# EAGLE board day0_YogaSanyoto_13215073 (EAGLE 7.6.0)
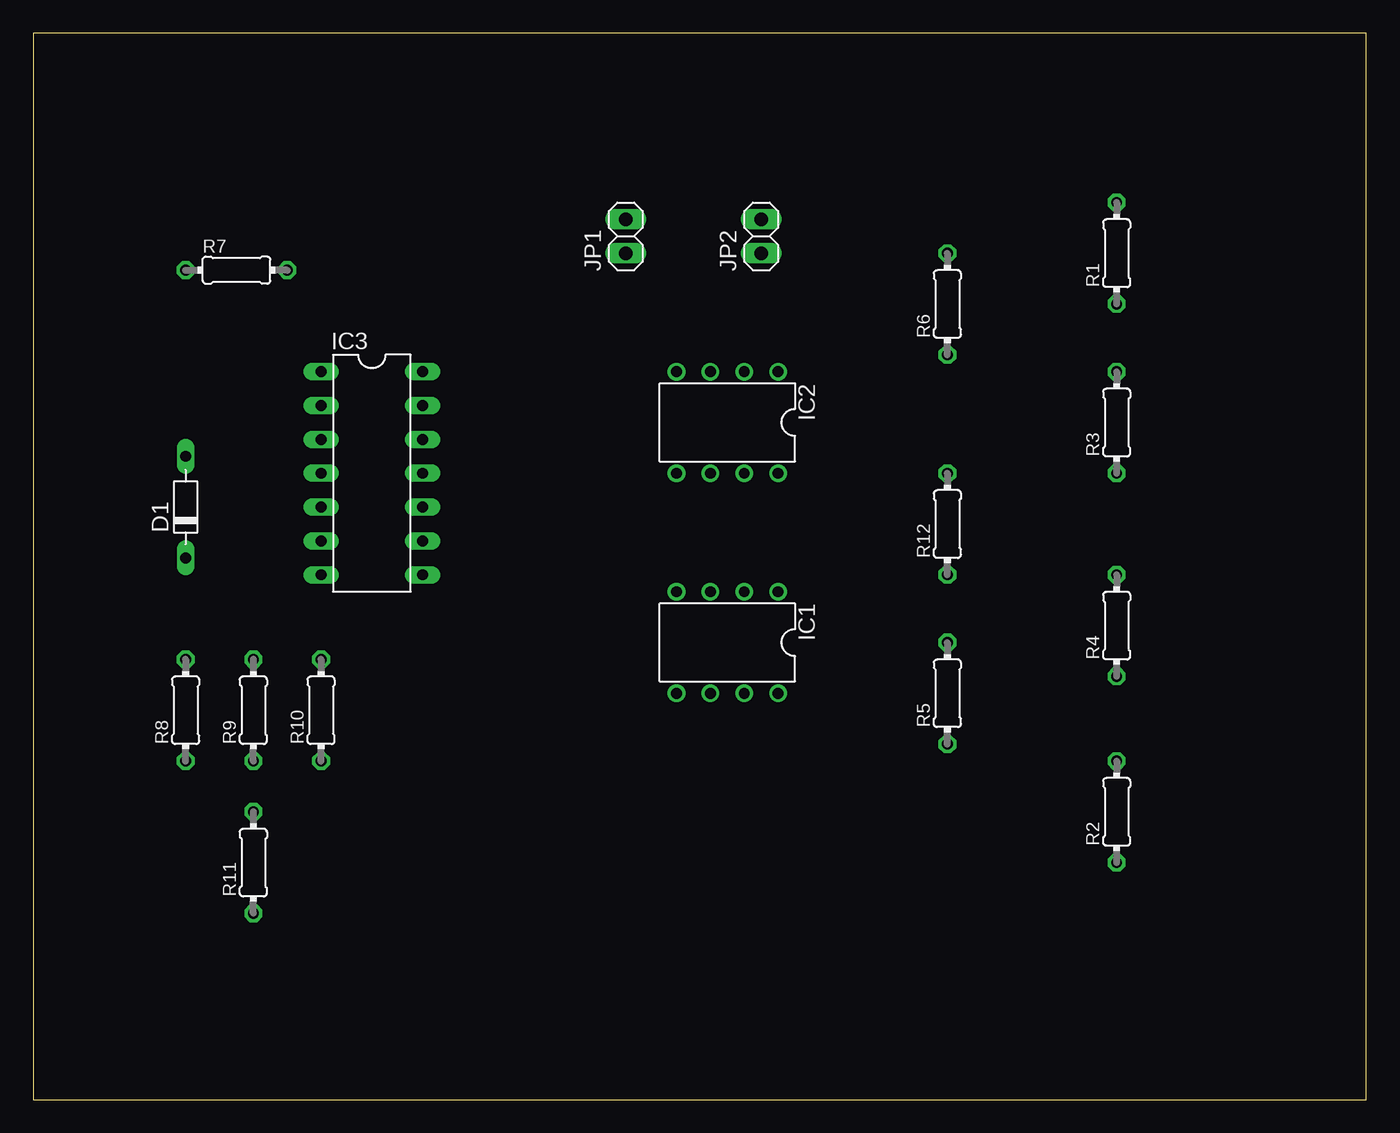
[diagram p0: board, top side]
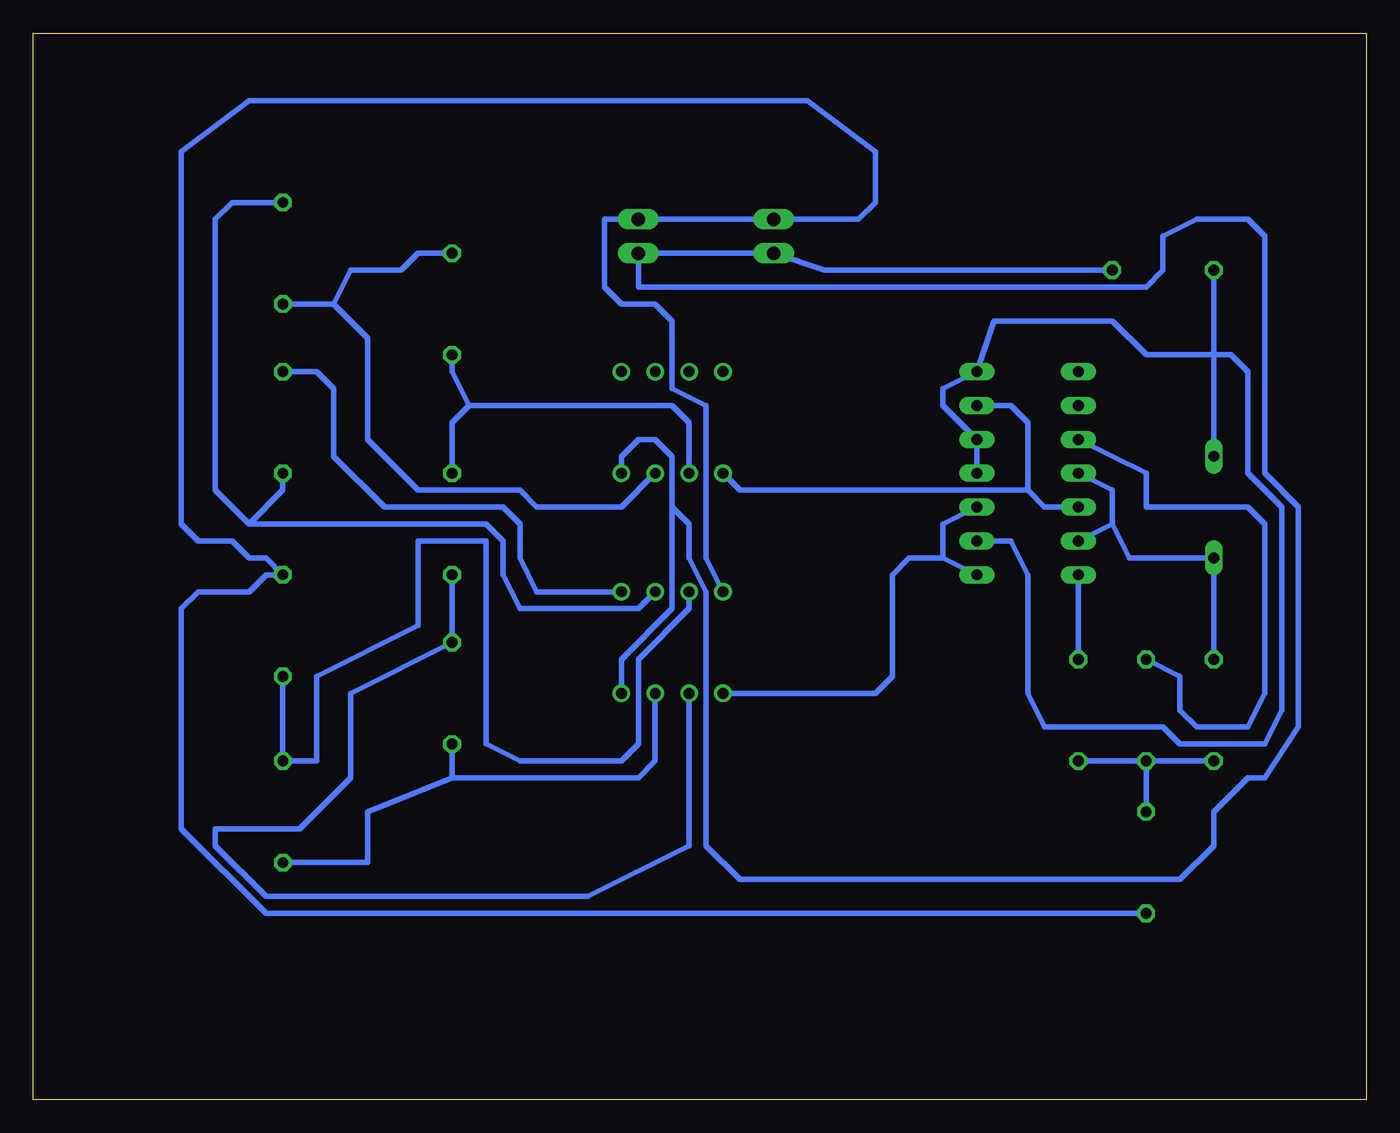
[diagram p1: board, bottom side, seen from below]

Size 100 x 80 mm. Coordinates in mm from the lower left corner, seen from the top.
Outline: 0,0 100,0 100,80 0,80 0,0
Copper layers (1*16): Top 0.035mm / dielectric 1.5mm / Bottom 0.035mm
Design rules "default": minimum track width 10mil, minimum drill 24mil, track to track 8mil, track to pad 8mil, pad to pad 8mil, via to via 8mil, smd to smd 8mil, copper to edge 40mil, drill to drill 8mil, minimum pad ring 10mil, minimum via ring 8mil, stop-mask expansion 4mil, vias tented up to drill 0mil, thermal gap 10mil

## Footprints (pad centres in the part's own frame; a part is rotated, then mirrored left to right if it is on the bottom)
D-7.5 = drill 0.813 long: A 3.81,0; C -3.81,0
DIL08 = drill 0.813 pad 1.27: 1 -3.81,-3.81; 2 -1.27,-3.81; 3 1.27,-3.81; 4 3.81,-3.81; 5 3.81,3.81; 6 1.27,3.81; 7 -1.27,3.81; 8 -3.81,3.81
DIL14 = drill 0.813 long: 1 -7.62,-3.81; 2 -5.08,-3.81; 3 -2.54,-3.81; 4 0,-3.81; 5 2.54,-3.81; 6 5.08,-3.81; 7 7.62,-3.81; 8 7.62,3.81; 9 5.08,3.81; 10 2.54,3.81; 11 0,3.81; 12 -2.54,3.81; 13 -5.08,3.81; 14 -7.62,3.81
1X02 = drill 1.016 long: 1 -1.27,0; 2 1.27,0
0204/7 = drill 0.813 octagon: 1 -3.81,0; 2 3.81,0

## Placement (x,y rotation side)
D1  [D-7.5]  11.43,44.45 90 top
IC1  LM358N  [DIL08]  52.07,34.29 180 top
IC2  LM358N  [DIL08]  52.07,50.8 180 top
IC3  [DIL14]  25.4,46.99 270 top
JP1  [1X02]  44.45,64.77 90 top
JP2  [1X02]  54.61,64.77 90 top
R1  100k  [0204/7]  81.28,63.5 90 top
R2  100k  [0204/7]  81.28,21.59 90 top
R3  100k  [0204/7]  81.28,50.8 90 top
R4  100k  [0204/7]  81.28,35.56 90 top
R5  100k  [0204/7]  68.58,30.48 90 top
R6  100k  [0204/7]  68.58,59.69 90 top
R7  60k  [0204/7]  15.24,62.23 0 top
R8  12K  [0204/7]  11.43,29.21 90 top
R9  100k  [0204/7]  16.51,29.21 90 top
R10  200k  [0204/7]  21.59,29.21 90 top
R11  60k  [0204/7]  16.51,17.78 90 top
R12  [0204/7]  68.58,43.18 90 top

## Library data of the parts
D1 = diode
IC1 IC2 = linear
IC3 = ic-package
JP1 JP2 = pinhead
R1-R12 = rcl

## Nets
GND: IC1.4 JP1.2 JP2.2 R4.2 R11.1
N$1: R8.1 R9.1 R10.1 R11.2
N$2: IC3.7 R10.2
N$3: IC3.3 R9.2
N$4: D1.C IC3.4 IC3.6 R8.2
N$5: D1.A IC3.9 IC3.11 IC3.12 IC3.14 R7.1
N$6: IC1.6 R5.2 R12.1
N$7: IC2.6 R6.1 R12.2
N$8: IC2.7 R1.1 R6.2
N$9: IC1.7 R2.1 R5.1
N$10: IC1.2 R1.2 R3.1
N$11: IC1.3 R2.2 R4.1
N$15: IC1.5 IC3.8 IC3.10
N$16: IC2.5 IC3.5 IC3.13
V-: IC2.4
VCC: IC1.8 IC2.8 JP1.1 JP2.1 R7.2
VOUT: IC1.1 R3.2

## Tracks (layer width: path | path; a pad name or v marks a point on that pad's centre or on a via)
GND
  Bottom 0.406: R11.1 82.55,13.97 88.9,20.32 88.9,36.83 87.63,38.1 83.82,38.1 82.55,39.37 R4.2 82.55,40.64 83.82,40.64 85.09,41.91 87.63,41.91 88.9,43.18 88.9,71.12 83.82,74.93 41.91,74.93 36.83,71.12 36.83,67.31 38.1,66.04 JP1.2 JP2.2 57.15,66.04 57.15,60.96 55.88,59.69 53.34,59.69 52.07,58.42 52.07,53.34 49.53,52.07 49.53,40.64 IC1.4
N$1
  Bottom 0.406: R11.2 R9.1 | R9.1 R10.1 | R8.1 R9.1
N$2
  Bottom 0.406: IC3.7 R10.2
N$3
  Bottom 0.406: R9.2 13.97,31.75 13.97,29.21 12.7,27.94 8.89,27.94 7.62,30.48 7.62,43.18 8.89,44.45 16.51,44.45 16.51,46.99 IC3.3
N$4
  Bottom 0.406: R8.2 D1.C 17.78,40.64 19.05,43.18 | IC3.6 19.05,43.18 | 19.05,43.18 19.05,45.72 IC3.4
N$5
  Bottom 0.406: D1.A 11.43,55.88 | 11.43,55.88 R7.1 | IC3.11 IC3.12 31.75,52.07 31.75,53.34 IC3.14 27.94,58.42 19.05,58.42 16.51,55.88 11.43,55.88 | IC3.9 26.67,41.91 25.4,39.37 25.4,30.48 24.13,27.94 15.24,27.94 13.97,26.67 7.62,26.67 6.35,29.21 6.35,44.45 8.89,46.99 8.89,54.61 10.16,55.88 11.43,55.88
N$6
  Bottom 0.406: IC1.6 50.8,19.05 58.42,15.24 82.55,15.24 86.36,19.05 86.36,20.32 80.01,20.32 76.2,24.13 76.2,30.48 R5.2 R12.1
N$7
  Bottom 0.406: IC2.6 50.8,50.8 52.07,52.07 67.31,52.07 | 67.31,52.07 68.58,54.61 R6.1 | R12.2 68.58,50.8 67.31,52.07
N$8
  Bottom 0.406: IC2.7 55.88,44.45 62.23,44.45 63.5,45.72 71.12,45.72 74.93,49.53 74.93,57.15 77.47,59.69 | 77.47,59.69 R1.1 | R6.2 71.12,63.5 72.39,62.23 76.2,62.23 77.47,59.69
N$9
  Bottom 0.406: R5.1 68.58,24.13 | 68.58,24.13 74.93,21.59 74.93,17.78 R2.1 | 68.58,24.13 60.96,24.13 59.69,24.13 54.61,24.13 53.34,25.4 IC1.7
N$10
  Bottom 0.406: 83.82,43.18 86.36,45.72 86.36,66.04 85.09,67.31 R1.2 | 83.82,43.18 66.04,43.18 64.77,41.91 64.77,39.37 63.5,36.83 54.61,36.83 IC1.2 | R3.1 81.28,45.72 83.82,43.18
N$11
  Bottom 0.406: R4.1 R2.2 78.74,25.4 78.74,31.75 71.12,35.56 71.12,41.91 66.04,41.91 66.04,26.67 63.5,25.4 55.88,25.4 54.61,26.67 54.61,33.02 50.8,36.83 IC1.3
N$15
  Bottom 0.406: IC1.5 36.83,30.48 35.56,31.75 35.56,39.37 34.29,40.64 31.75,40.64 | IC3.8 31.75,40.64 | 31.75,40.64 31.75,43.18 IC3.10
N$16
  Bottom 0.406: 25.4,45.72 46.99,45.72 IC2.5 | IC3.5 24.13,44.45 25.4,45.72 | 25.4,45.72 25.4,50.8 26.67,52.07 IC3.13
VCC
  Bottom 0.406: R7.2 40.64,62.23 JP1.1 JP2.1 54.61,60.96 16.51,60.96 15.24,62.23 15.24,64.77 12.7,66.04 8.89,66.04 7.62,64.77 7.62,46.99 5.08,44.45 5.08,27.94 7.62,24.13 8.89,24.13 11.43,21.59 11.43,19.05 13.97,16.51 46.99,16.51 49.53,19.05 49.53,38.1 50.8,40.64 50.8,43.18 52.07,44.45 | IC1.8 55.88,33.02 52.07,36.83 52.07,44.45 | 52.07,44.45 52.07,48.26 53.34,49.53 54.61,49.53 55.88,48.26 IC2.8
VOUT
  Bottom 0.406: IC1.1 62.23,38.1 63.5,40.64 63.5,43.18 64.77,44.45 73.66,44.45 77.47,48.26 77.47,53.34 78.74,54.61 R3.2